# Altium PCB Atmel AVR consumer electronics control board.PcbDoc (part 4 of 4)
Units mm, origin at the board's own origin, x right, y up, seen from the top; angles counter-clockwise.
Board outline 310.13 x 89.13 mm, 2 copper layers (Top Layer, Top, Bottom Layer, Bottom); 455 components, 162 nets, 940 pads, 0 vias.
Unrouted connection lines stored in the file: 21.
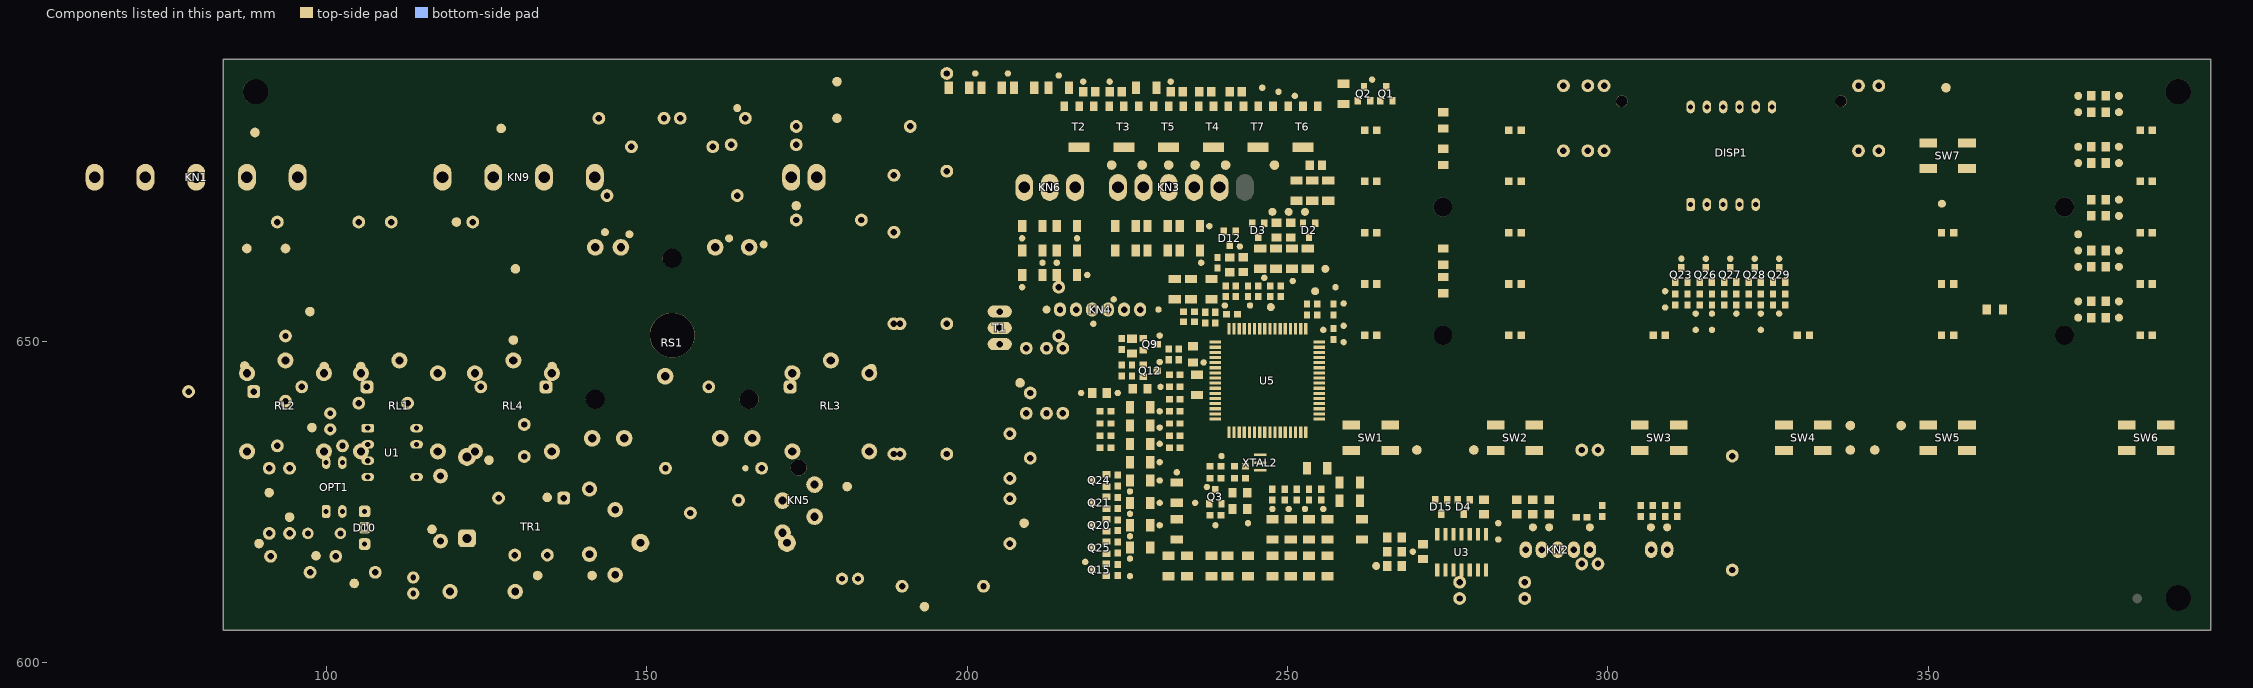
[diagram p4: the components of this part, seen from the top]

## Polygon pours and split planes (outlines as drawn)
JET_POMPASI on Top Layer, Top "Top Layer, Top-JET_POMPASI" (solid, remove dead copper, pour order 290): 244.157,674.053 246.697,676.592 249.237,676.592 252.095,679.45 253.682,679.45 254,679.767 254,681.038 250.825,681.038 248.285,678.497 245.427,678.497 242.252,675.322 242.252,674.053
DOORLOCK on Top Layer, Top "Top Layer, Top-DOORLOCK" (solid, remove dead copper, pour order 288): 224.79,674.053 224.79,676.592 220.345,681.038 215.9,681.038 215.9,679.767 218.757,679.767 222.25,676.275 222.25,674.053
PHASE on Top Layer, Top "Top Layer, Top-PHASE" (solid, remove dead copper, pour order 286): 218.44,675.322 217.487,676.275 214.63,676.275 212.09,678.815 207.327,678.815 207.327,675.322 207.327,672.783 208.28,671.83 212.09,671.83 212.725,671.195 213.042,671.195 213.677,671.83 217.487,671.83 218.44,672.783
-5V on Top Layer, Top "Top Layer, Top--5V" (solid, remove dead copper, pour order 284): 244.792,637.54 245.11,637.857 252.412,637.857 253.047,638.492 253.047,648.335 251.142,650.24 249.936,650.24 249.809,650.367 249.809,652.018 249.492,652.018 249.492,650.367 249.364,650.24 242.252,650.24 243.205,649.288 243.205,641.35 244.475,640.08 244.792,639.762
0V on Top Layer, Top "Top Layer, Top-0V" (solid, remove dead copper, pour order 282): 179.07,677.545 179.07,673.735 180.022,672.783 187.007,672.783 187.007,676.91 184.468,679.45 184.468,681.038 184.15,681.355 182.88,681.355
PHASE on Top Layer, Top "Top Layer, Top-PHASE 1" (solid, remove dead copper, pour order 280): 159.385,677.545 161.607,679.767 161.607,681.038 160.972,681.673 157.162,681.673 156.21,680.72 156.21,674.37 157.162,673.418 158.433,673.418 159.385,674.37
STATOR_COM on Top Layer, Top "Top Layer, Top-STATOR_COM" (solid, remove dead copper, pour order 278): 112.712,678.18 110.49,678.18 109.855,677.545 109.855,657.86 115.887,651.827 126.365,651.827 127.635,650.558 127.635,646.112 128.27,645.477 130.175,645.477 130.81,646.112 130.81,651.192 127.635,654.367 117.157,654.367 113.347,658.178 113.347,677.545
STATOR_LOW_SPEED on Top Layer, Top "Top Layer, Top-STATOR_LOW_SPEED" (solid, remove dead copper, pour order 276): 101.917,675.005 92.392,665.48 92.392,660.4 93.027,659.765 100.647,659.765 101.282,660.4 101.282,669.925 105.093,673.735 105.093,677.545 104.457,678.18 102.552,678.18 101.917,677.545
STATOR_HIGH_SPEED on Top Layer, Top "Top Layer, Top-STATOR_HIGH_SPEED" (solid, remove dead copper, pour order 274): 89.218,666.115 97.472,674.37 97.472,677.545 96.52,678.497 94.932,678.497 86.042,669.607 86.042,660.4 86.677,659.765 88.582,659.765 89.218,660.4
~ROTOR on Top Layer, Top "Top Layer, Top-~ROTOR" (solid, remove dead copper, pour order 272): 120.968,679.132 123.507,681.673 134.938,681.673 134.938,684.847 122.237,684.847 117.792,680.402 117.792,674.053 118.427,673.418 120.332,673.418 120.968,674.053
ROTOR on Top Layer, Top "Top Layer, Top-ROTOR" (solid, remove dead copper, pour order 270): 125.73,674.37 127.953,672.147 127.953,660.082 126.365,658.495 120.65,658.495 119.062,660.082 119.062,662.305 118.427,662.94 116.522,662.94 115.887,662.305 115.887,658.812 118.745,655.955 132.398,655.955 136.843,660.4 136.843,662.305 136.207,662.94 134.302,662.94 130.493,666.75 130.493,675.957 128.27,678.18 126.365,678.18 125.73,677.545
-5V on Top Layer, Top "Top Layer, Top--5V 1" (solid, remove dead copper, pour order 268): 271.145,615.632 272.733,615.632 273.05,615.95 280.416,615.95 280.733,615.632 280.733,614.045 281.241,614.045 281.241,616.649 280.67,617.22 273.368,617.22 272.733,616.585 271.145,616.585
0V on Top Layer, Top "Top Layer, Top-0V 1" (solid, remove dead copper, pour order 266): 254.317,687.07 254.317,685.482 253.682,684.847 248.92,684.847 248.285,685.482 248.285,687.07 247.332,687.07 247.332,685.482 246.697,684.847 241.935,684.847 241.3,685.482 241.3,687.07 240.347,687.07 240.347,685.482 239.712,684.847 234.95,684.847 234.315,685.482 234.315,687.07 233.362,687.07 233.362,685.482 232.727,684.847 227.965,684.847 227.33,685.482 227.33,687.07 226.377,687.07 226.377,685.482 225.742,684.847 220.98,684.847 220.345,685.482 220.345,687.07 219.392,687.07 219.392,685.482 218.757,684.847 215.582,684.847 215.582,682.308 254.317,682.308 255.27,682.308 255.587,681.99 255.587,682.625 255.587,683.577 255.27,683.895 255.27,687.07
AC2 on Top Layer, Top "Top Layer, Top-AC2" (solid, remove dead copper, pour order 264): 194.31,681.038 189.23,681.038 183.832,686.435 177.8,686.435 177.8,683.577 183.197,683.577 188.278,678.497 193.04,678.497 196.215,675.322 197.485,675.322 198.12,675.957 198.12,677.227
PHASE on Top Layer, Top "Top Layer, Top-PHASE 2" (solid, remove dead copper, pour order 262): 159.385,683.26 159.385,687.705 156.845,690.245 152.082,685.482 152.082,684.212 156.21,680.085 156.21,680.72 157.162,681.673 160.972,681.673
0V on Top Layer, Top "Top Layer, Top-0V 2" (solid, remove dead copper, pour order 260): 166.052,651.51 172.085,651.51 173.355,652.78 181.292,652.78 182.562,651.51 189.547,651.51 190.183,652.145 190.183,653.415 188.912,654.685 181.927,654.685 178.118,658.495 178.118,661.035 176.53,662.622 170.498,662.622 168.593,660.717 166.052,660.717
0V on Top Layer, Top "Top Layer, Top-0V 3" (solid, remove dead copper, pour order 258): 153.987,655.32 156.21,655.32 160.02,651.51 167.005,651.51 167.005,660.717 156.528,660.717 153.987,660.717
-5V on Top Layer, Top "Top Layer, Top--5V 2" (solid, remove dead copper, pour order 256): 191.135,631.825 191.135,638.81 186.69,643.255 184.15,643.255 184.15,642.62 188.595,638.175 188.595,631.507 188.912,631.19 190.5,631.19
NET00056 on Top Layer, Top "Top Layer, Top-NET00056" (solid, pour order 254): 92.4,646.2 92.8,645.8 93.6,645.8 94.9,645.8 95.25,646.112 95.25,650.875 97.79,653.415 107.315,653.415 109.855,650.875 109.855,646.112 110.49,645.477 112.395,645.477 113.03,646.112 113.03,651.51 108.267,656.272 95.885,656.272 92.5,652.3 92.5,651.3 92.5,650.3 92.5,649.2 92.5,648.3 92.4,647.3
NET00047 on Top Layer, Top "Top Layer, Top-NET00047" (solid, remove dead copper, pour order 252): 274.637,621.03 275.272,621.665 277.812,621.665 278.447,621.03 279.082,621.665 280.352,621.665 280.988,621.03 281.305,621.347 282.892,621.347 282.892,621.982 274.637,621.982 274.32,622.3 274.32,623.252 273.685,623.252 273.685,622.3 273.685,621.982
NET00055 on Top Layer, Top "Top Layer, Top-NET00055" (solid, remove dead copper, pour order 250): 277.178,618.173 277.495,617.855 281.623,617.855 281.94,618.173 280.035,618.173 279.717,618.49 279.4,618.173 277.495,618.173 277.178,618.49
PHASE on Top Layer, Top "Top Layer, Top-PHASE 3" (solid, remove dead copper, pour order 248): 159.385,687.705 161.29,689.61 191.77,689.61 192.722,688.658 195.262,688.658 195.262,690.245 195.262,692.785 159.385,692.785 156.845,690.245
HEATER_P on Top Layer, Top "Top Layer, Top-HEATER_P" (solid, remove dead copper, pour order 246): 176.657,639 179.705,635.952 179.705,626.872 180.022,626.554 184.15,626.554 185.293,627.697 185.293,636.841 180.848,641.286 180.848,646.875 180.34,647.382 180.34,648.017 179.705,648.652 177.8,648.652 177.165,648.017 177.165,647.319 176.657,646.811
SUTUN_3 on Top Layer, Top "Top Layer, Top-SUTUN_3" (solid, remove dead copper, pour order 244): 319.62,670.3 320.02,669.9 320.02,669.28 320.46,668.84 321.46,668.84 321.02,669.28 321.02,669.9 321.42,670.3 321.42,672.5 321.02,672.9 321.02,673.87 320.02,674.87 320.02,672.9 319.62,672.5
HOT_WATER on Top Layer, Top "Top Layer, Top-HOT_WATER" (solid, remove dead copper, pour order 242): 240.665,674.053 240.665,676.592 243.522,679.45 246.697,679.45 247.015,679.767 247.015,681.038 242.57,681.038 238.125,676.592 238.125,674.053
PREWASH on Top Layer, Top "Top Layer, Top-PREWASH" (solid, remove dead copper, pour order 240): 236.537,674.053 236.537,677.545 238.125,679.132 239.395,679.132 240.03,679.767 240.03,681.038 236.855,681.038 234.315,678.497 234.315,674.053
TAHLIYE_POMPASI on Top Layer, Top "Top Layer, Top-TAHLIYE_POMPASI" (solid, remove dead copper, pour order 238): 228.6,674.053 228.6,678.497 226.06,681.038 222.885,681.038 222.885,679.767 223.52,679.132 224.79,679.132 226.377,677.545 226.377,674.053
0V on Top Layer, Top "Top Layer, Top-0V 4" (solid, remove dead copper, pour order 236): 244.157,639.445 242.57,641.033 242.57,648.97 241.3,650.24 241.3,640.397 244.157,637.54
0V on Top Layer, Top "Top Layer, Top-0V 5" (solid, pour order 234): 187.96,671.83 189.23,671.83 190.183,672.783 193.992,672.783 195.58,671.195 195.58,665.798 198.755,662.622 198.755,666.115 198.12,666.75 198.12,672.147 193.357,676.91 187.007,676.91 187.007,672.783 187.325,672.465
NET00024 on Top Layer, Top "Top Layer, Top-NET00024" (solid, remove dead copper, pour order 232): 203.517,643.572 204.47,642.62 207.645,642.62 208.28,641.985 208.28,641.033 208.28,638.81 210.185,638.81 210.185,640.715 210.82,641.35 210.82,642.62 207.963,645.477 203.835,645.477 203.517,645.16
PHASE on Top Layer, Top "Top Layer, Top-PHASE 4" (solid, pour order 230): 195.262,688.658 192.722,688.658 206.692,674.688 206.692,673.418 207.327,672.783 207.327,678.815 206.692,678.815 197.485,688.022 197.485,691.515 196.215,692.785 195.262,692.785
TACHO_K2 on Top Layer, Top "Top Layer, Top-TACHO_K2" (solid, remove dead copper, pour order 228): 173.355,681.673 172.403,680.72 172.403,669.607 172.403,668.972 174.308,668.972 174.308,669.925 178.118,673.735 178.118,677.545 177.165,678.497 173.99,681.673
AC2 on Top Layer, Top "Top Layer, Top-AC2 1" (solid, remove dead copper, pour order 226): 162.877,672.147 163.512,671.512 165.735,671.512 168.91,674.688 168.91,680.402 172.085,683.577 177.8,683.577 177.8,686.435 171.513,686.435 165.417,680.339 165.417,678.18 164.147,676.91 164.147,674.688 162.877,673.418
NET00096 on Top Layer, Top "Top Layer, Top-NET00096" (solid, remove dead copper, pour order 224): 173.291,642.175 173.291,648.271 173.99,648.97 173.99,649.923 176.213,652.145 174.308,652.145 171.132,648.97 171.132,642.303 171.45,641.985 172.72,641.985
0V on Top Layer, Top "Top Layer, Top-0V 6" (solid, remove dead copper, pour order 222): 139.7,641.921 141.097,643.318 142.939,643.318 144.082,641.921 144.082,641.033 150.495,641.033 150.495,648.017 149.542,648.97 149.542,653.097 151.765,655.32 153.987,655.32 153.987,660.717 151.447,660.717 145.097,660.717 138.748,654.367 138.748,642.303 138.748,641.033 139.7,641.033
~ROTOR on Top Layer, Top "Top Layer, Top-~ROTOR 1" (solid, remove dead copper, pour order 220): 148.273,674.37 149.225,673.418 150.495,673.418 151.447,674.37 151.447,678.815 145.415,684.847 134.938,684.847 134.938,681.673 144.145,681.673 148.273,677.545
P on Top Layer, Top "Top Layer, Top-P" (solid, remove dead copper, pour order 218): 133.985,673.418 133.985,668.02 134.938,667.067 137.16,667.067 141.605,671.512 144.463,671.512 145.097,672.147 145.097,673.418 143.51,675.005 143.51,677.227 142.558,678.18 138.748,678.18
-5V on Top Layer, Top "Top Layer, Top--5V 3" (solid, remove dead copper, pour order 216): 98.425,644.207 97.79,643.572 97.79,641.35 98.425,641.033 99.695,641.033 101.282,641.033 102.235,641.033 102.87,640.397 103.505,640.397 105.093,640.397 106.362,640.397 106.998,640.397 109.22,640.397 111.125,640.397 113,639.5 113.75,640 113.75,640.75 113,641 102.87,641.033 100.965,642.938 100.965,648.97 100.647,649.288 98.742,649.288 98.425,648.97
NET00045 on Top Layer, Top "Top Layer, Top-NET00045" (solid, remove dead copper, pour order 214): 104.14,643.572 105.727,641.985 108.902,641.985 106.68,644.207 106.68,648.97 106.362,649.288 104.457,649.288 104.14,648.97
-5V on Top Layer, Top "Top Layer, Top--5V 4" (solid, remove dead copper, pour order 212): 115.57,642.62 118.745,639.445 121.92,639.445 125.095,642.62 125.095,643.572 124.46,644.207 124.46,648.97 123.19,650.24 117.475,650.24 116.205,648.97 116.205,644.207 115.57,643.572
NET00028 on Top Layer, Top "Top Layer, Top-NET00028" (solid, remove dead copper, pour order 210): 86.2,649.4 86.2,646.1 86.2,642.9 87.7,641.4 89.6,641.4 90.9,641.4 93.3,641.4 92.967,641.765 91.44,641.767 88.5,643.8 88.2,644 88,644.6 88,645.2 88,645.7 88,646.1 88,646.4 88,646.8 88,647.2 88,647.5 88.2,647.7 88.3,648 88.5,648.5 88.8,648.9 88.8,649.4 88.4,650.1 86.9,650.1
SUTUN_3 on Top Layer, Top "Top Layer, Top-SUTUN_3 1" (solid, remove dead copper, pour order 208): 352.107,670.56 353.695,672.147 350.52,672.147
_SATIR_2 on Top Layer, Top "Top Layer, Top-_SATIR_2" (solid, remove dead copper, pour order 206): 319.62,685.54 320.02,685.14 321.02,685.14 321.42,685.54 321.42,687.74 321.02,688.14 320.02,688.14 319.62,687.74
SUTUN_2 on Top Layer, Top "Top Layer, Top-SUTUN_2" (solid, remove dead copper, pour order 204): 327.66,676.91 325.755,678.815 325.438,678.815 323.532,676.91
_SATIR_1 on Top Layer, Top "Top Layer, Top-_SATIR_1" (solid, remove dead copper, pour order 202): 310.9,686.63 312.4,685.13 313.4,685.14 313.8,685.54 313.8,687.74 313.4,688.14 312.41,688.14
SUTUN_5 on Top Layer, Top "Top Layer, Top-SUTUN_5" (solid, remove dead copper, pour order 200): 312,670.3 312.4,669.9 312.4,669.14 313.4,668.14 313.4,669.9 313.8,670.3 313.8,672.5 313.4,672.9 312.4,672.9 312,672.5
0V on Top Layer, Top "Top Layer, Top-0V 7" (solid, remove dead copper, pour order 198): 318.452,631.19 318.452,615.95 320.357,617.855 320.357,631.19 320.675,631.507 320.675,632.777 320.04,633.413 318.77,633.413 318.135,632.777 318.135,631.507
NTC_K1 on Top Layer, Top "Top Layer, Top-NTC_K1" (solid, remove dead copper, pour order 196): 296.227,618.934 296.227,617.347 296.227,615.188 298.132,617.093 298.132,618.934 297.18,619.887
K_SU_SEVIYE_1 on Top Layer, Top "Top Layer, Top-K_SU_SEVIYE_1" (solid, remove dead copper, pour order 194): 290.639,616.458 290.639,618.934 289.814,619.76 289.496,619.76 288.671,618.934 288.671,616.458 289.179,615.95 290.131,615.95
-5V on Top Layer, Top "Top Layer, Top--5V 5" (solid, remove dead copper, pour order 192): 297.18,610.87 295.91,610.87 294.957,611.822 294.957,609.918 295.91,608.965 297.18,608.965
TX on Top Layer, Top "Top Layer, Top-TX" (solid, remove dead copper, pour order 190): 221,653.5 222,652.5 223.5,652.5 223,653 223,656.5 221.4,656.5 221,656.1
SCK on Top Layer, Top "Top Layer, Top-SCK" (solid, remove dead copper, pour order 188): 218.5,653 219.7,651.8 221.2,651.8 220.5,652.5 220.5,656.1 220.1,656.5 218.9,656.5 218.5,656.1
_RESET on Top Layer, Top "Top Layer, Top-_RESET" (solid, remove dead copper, pour order 186): 227,654 229.6,654 228.9,654.7 228.9,655.2 228,656.1 227,656.1
-5V on Top Layer, Top "Top Layer, Top--5V 6" (solid, remove dead copper, pour order 184): 243.205,630.872 243.205,630.237 243.84,630.237 244.157,630.555 244.157,630.872 244.475,631.19 244.157,631.507 244.157,632.777 243.522,632.142 243.522,630.872
0V on Top Layer, Top "Top Layer, Top-0V 8" (solid, remove dead copper, pour order 182): 187.325,684.212 189.23,682.308 191.77,682.308 192.405,682.942 192.405,684.212 190.5,686.117 187.96,686.117 187.325,685.482
0V on Top Layer, Top "Top Layer, Top-0V 9" (solid, remove dead copper, pour order 180): 208.597,651.192 210.185,651.192 210.185,653.097 208.597,653.097 206.058,655.637 206.058,659.447 200.025,665.48 199.39,665.48 198.755,666.115 198.755,662.622 203.517,657.86 203.517,649.288 204.153,648.652 206.058,648.652
AC2 on Top Layer, Top "Top Layer, Top-AC2 2" (solid, remove dead copper, pour order 178): 206.375,648.017 203.2,648.017 202.248,648.97 202.248,657.86 197.485,662.622 196.215,662.622 195.58,661.987 195.58,660.717 199.39,656.908 199.39,648.017 201.295,646.112 206.375,646.112 206.692,646.43 206.692,647.7
-5V on Top Layer, Top "Top Layer, Top--5V 7" (solid, remove dead copper, pour order 176): 213.36,638.81 213.36,639.762 212.407,640.715 211.455,639.762 211.455,638.81
-5V on Top Layer, Top "Top Layer, Top--5V 8" (solid, remove dead copper, pour order 174): 206.68,624.548 211.125,624.548 213.347,626.77 213.347,628.675 211.442,628.675 211.442,627.405 210.49,626.453 206.68,626.453
NTC_K1 on Top Layer, Top "Top Layer, Top-NTC_K1 1" (solid, remove dead copper, pour order 172): 204.153,630.237 203.835,630.555 200.66,630.555 197.485,633.73 196.215,633.73 195.58,633.095 195.58,631.825 197.167,630.237
0V on Top Layer, Top "Top Layer, Top-0V 10" (solid, remove dead copper, pour order 170): 202.565,610.553 207,606 208.3,606 209.75,606 203.835,611.822 203.835,612.457 203.2,613.092 201.93,613.092 201.295,612.457 201.295,611.188 201.93,610.553
220_LINE on Top Layer, Top "Top Layer, Top-220_LINE" (solid, remove dead copper, pour order 168): 177.737,626.682 177.737,634.111 173.165,638.683 161.481,638.683 159.067,636.27 159.067,633.73 163.195,629.602 166.052,629.602 167.005,628.65 167.64,628.65 168.275,628.015 168.275,627.062 169.227,627.062 169.862,626.428 169.862,617.538 170.815,616.585 172.72,616.585 173.672,617.538 173.672,622.617
0V on Top Layer, Top "Top Layer, Top-0V 11" (solid, remove dead copper, pour order 166): 148.907,633.73 148.907,636.27 147.955,637.222 147.955,638.175 150.495,640.715 150.5,641.5 144.082,641.54 144.082,640.207 142.939,638.683 141.097,638.683 139.7,640.08 139.7,641.033 138.748,641.033 138.748,639.127 138.745,638.259 138.745,637.667 138.745,636.943 138.748,636.27 138.748,633.73 140.208,632.711 142.74,632.711 147.764,632.709
P on Top Layer, Top "Top Layer, Top-P 1" (solid, remove dead copper, pour order 164): 117.475,670.242 116.522,669.29 116.522,668.02 117.475,667.067 120.015,667.067 121.602,665.48 121.602,660.717 122.237,660.082 124.142,660.082 124.777,660.717 124.777,669.29 123.825,670.242
P on Top Layer, Top "Top Layer, Top-P 2" (solid, remove dead copper, pour order 162): 104.775,670.242 103.822,669.29 103.822,660.4 104.457,659.765 106.362,659.765 106.998,660.4 106.998,661.987 106.998,669.29 106.045,670.242
SUTUN_1 on Top Layer, Top "Top Layer, Top-SUTUN_1" (solid, remove dead copper, pour order 160): 342.265,678.815 344.805,678.815 344.805,679.45 343.217,681.038 342.265,681.99 341.312,681.038 341.312,679.767
SUTUN_1 on Top Layer, Top "Top Layer, Top-SUTUN_1 1" (solid, remove dead copper, pour order 158): 341.63,670.242 340.678,669.29 340.678,668.02 341.947,668.02 342.9,668.972
_SATIR_2 on Top Layer, Top "Top Layer, Top-_SATIR_2 1" (solid, remove dead copper, pour order 156): 320.01,683.7 321.03,684.72 321.03,685.44 320.01,685.44
0V on Top Layer, Top "Top Layer, Top-0V 12" (solid, remove dead copper, pour order 154): 320.04,648.652 321.31,649.923 320.04,651.192 318.77,651.192 318.135,650.558 318.135,649.288 318.77,648.652
_SATIR_2 on Top Layer, Top "Top Layer, Top-_SATIR_2 2" (solid, remove dead copper, pour order 152): 297.815,679.767 297.815,681.355 298.767,682.308 296.863,682.308 295.91,681.355 295.91,679.767
_SATIR_2 on Top Layer, Top "Top Layer, Top-_SATIR_2 3" (solid, remove dead copper, pour order 150): 295.91,669.607 295.91,668.02 296.863,667.067 297.815,668.02 297.815,669.607
-5V on Top Layer, Top "Top Layer, Top--5V 9" (solid, remove dead copper, pour order 148): 296.863,648.652 297.815,648.652 299.402,650.24 299.402,650.875 297.498,650.875 297.498,649.288
K_FLOWM_2 on Top Layer, Top "Top Layer, Top-K_FLOWM_2" (solid, remove dead copper, pour order 146): 304.8,621.982 306.387,620.395 307.022,620.395 307.34,620.712 307.34,622.935 304.8,622.935
K_FLOWM_1 on Top Layer, Top "Top Layer, Top-K_FLOWM_1" (solid, remove dead copper, pour order 144): 297.18,611.505 298.767,611.505 299.72,612.457 298.767,613.41 297.18,613.41
NET00006 on Top Layer, Top "Top Layer, Top-NET00006" (solid, remove dead copper, pour order 142): 225.806,667.194 228.6,667.194 228.6,668.846 225.806,668.846
NET00016 on Top Layer, Top "Top Layer, Top-NET00016" (solid, remove dead copper, pour order 140): 205.105,688.658 207.645,688.658 207.645,691.515 206.692,692.467 206.058,692.467 205.105,691.515
0V on Top Layer, Top "Top Layer, Top-0V 13" (solid, pour order 138): 207.645,684.212 207.645,682.942 208.28,682.308 215.582,682.308 215.582,683.895 215.582,684.847 213.995,684.847 213.36,684.847 208.28,684.847
NET00077 on Top Layer, Top "Top Layer, Top-NET00077" (solid, remove dead copper, pour order 136): 214.947,651.51 213.995,652.462 212.725,652.462 212.725,651.192 213.677,650.24
NET00077 on Top Layer, Top "Top Layer, Top-NET00077 1" (solid, remove dead copper, pour order 134): 215.265,643.255 215.265,646.112 213.36,644.207 213.36,643.255
NTC on Top Layer, Top "Top Layer, Top-NTC" (solid, remove dead copper, pour order 132): 205.74,638.81 205.74,637.857 206.692,636.905 208.28,636.905 207.645,637.54 207.645,638.81
NTC_K1 on Top Layer, Top "Top Layer, Top-NTC_K1 2" (solid, remove dead copper, pour order 130): 207.327,629.285 206.058,630.555 203.517,630.555 206.058,628.015
NTC_K1 on Top Layer, Top "Top Layer, Top-NTC_K1 3" (solid, remove dead copper, pour order 128): 200.343,613.727 200.025,614.045 199.072,614.045 196.85,614.045 196.532,613.727 196.215,613.41 195.58,612.775 195.58,611.505 196.215,610.87 197.485,610.87 198.12,611.505
_ROTARY_4 on Top Layer, Top "Top Layer, Top-_ROTARY_4" (solid, remove dead copper, pour order 126): 165.1,663.257 167.322,663.257 169.227,665.163 168.275,666.115 165.1,666.115 164.465,665.48 164.465,663.892
_ROTARY_3 on Top Layer, Top "Top Layer, Top-_ROTARY_3" (solid, remove dead copper, pour order 124): 159.702,663.257 161.607,663.257 163.512,665.163 163.512,666.75 160.338,666.75 159.067,665.48 159.067,663.892
_ROTARY_2 on Top Layer, Top "Top Layer, Top-_ROTARY_2" (solid, remove dead copper, pour order 122): 145.097,663.257 147.002,663.257 147.637,663.892 147.637,665.48 150.177,668.02 149.86,668.02 149.225,667.385 146.368,667.385 144.463,665.48 144.463,663.892
_ROTARY_1 on Top Layer, Top "Top Layer, Top-_ROTARY_1" (solid, remove dead copper, pour order 120): 142.875,663.257 143.51,663.892 143.51,665.48 146.05,668.02 142.875,668.02 140.335,665.48 140.335,663.892 140.97,663.257
0V on Top Layer, Top "Top Layer, Top-0V 14" (solid, remove dead copper, pour order 118): 151.13,643.572 152.718,641.985 153.035,641.985 154.623,643.572 154.623,645.477 153.67,646.43 152.082,646.43 151.13,645.477
0V on Top Layer, Top "Top Layer, Top-0V 15" (solid, remove dead copper, pour order 116): 151.447,629.285 152.082,628.65 153.67,628.65 154.305,629.285 154.305,631.19 153.67,631.825 152.082,631.825 151.447,631.19
0V on Top Layer, Top "Top Layer, Top-0V 16" (solid, pour order 114): 103.188,639.127 103.188,637.222 103.188,635.952 106.045,633.095 115.57,633.095 118.9,638.2 118.9,639 109.75,639
MAINWASH on Top Layer, Top "Top Layer, Top-MAINWASH" (solid, remove dead copper, pour order 112): 232.727,674.053 232.727,681.038 230.188,681.038 230.188,674.053
-5V on Top Layer, Top "Top Layer, Top--5V 10" (solid, remove dead copper, pour order 110): 186.69,643.255 186.69,648.652 185.42,649.923 184.468,649.923 183.832,649.288 183.832,648.335 184.15,648.017 184.15,643.255
NET00066 on Top Layer, Top "Top Layer, Top-NET00066" (solid, remove dead copper, pour order 108): 133.985,644.207 133.35,643.572 133.35,642.938 134.302,641.985 134.938,641.985 136.525,643.572 136.525,649.605 135.255,650.875 133.985,649.605
SUTUN_4 on Top Layer, Top "Top Layer, Top-SUTUN_4" (solid, remove dead copper, pour order 106): 352.107,662.622 353.695,664.21 350.837,664.21 350.837,663.892
SUTUN_2 on Top Layer, Top "Top Layer, Top-SUTUN_2 1" (solid, remove dead copper, pour order 104): 338.137,677.862 337.185,676.91 340.995,676.91 340.042,677.862 340.042,679.767 338.137,679.767
_SATIR_4 on Top Layer, Top "Top Layer, Top-_SATIR_4" (solid, remove dead copper, pour order 102): 331.47,660.717 331.47,665.163 329.248,662.94
SUTUN_2 on Top Layer, Top "Top Layer, Top-SUTUN_2 2" (solid, remove dead copper, pour order 100): 324.7,685.54 325.1,685.14 325.1,684.08 325.6,683.58 326.1,684.08 326.1,685.14 326.5,685.54 326.5,687.74 326.1,688.14 325.1,688.14 324.7,687.74
_SATIR_3 on Top Layer, Top "Top Layer, Top-_SATIR_3" (solid, remove dead copper, pour order 98): 322.16,685.54 322.56,685.14 323.56,685.14 323.96,685.54 323.96,687.74 323.56,688.14 322.56,688.14 322.16,687.74
SUTUN_7 on Top Layer, Top "Top Layer, Top-SUTUN_7" (solid, remove dead copper, pour order 96): 322.16,670.3 322.56,669.9 323.56,669.9 323.96,670.3 323.96,672.5 323.06,673.4 322.16,672.5
SUTUN_6 on Top Layer, Top "Top Layer, Top-SUTUN_6" (solid, remove dead copper, pour order 94): 317.08,685.54 317.48,685.14 318.48,685.14 318.88,685.54 318.88,687.74 318.48,688.14 317.48,688.14 317.08,687.74
SUTUN_1 on Top Layer, Top "Top Layer, Top-SUTUN_1 2" (solid, remove dead copper, pour order 92): 314.54,685.54 314.94,685.14 315.94,685.14 316.34,685.54 316.34,687.74 315.94,688.14 314.94,688.14 314.54,687.74
SUTUN_8 on Top Layer, Top "Top Layer, Top-SUTUN_8" (solid, remove dead copper, pour order 90): 317.08,670.3 317.48,669.9 317.48,669.45 318.48,668.46 318.48,669.9 318.88,670.3 318.88,672.5 318.48,672.9 317.48,672.9 317.08,672.5
SUTUN_4 on Top Layer, Top "Top Layer, Top-SUTUN_4 1" (solid, remove dead copper, pour order 88): 314.54,670.3 314.94,669.9 314.94,669.15 315.94,668.15 315.94,669.9 316.34,670.3 316.34,672.5 315.94,672.9 314.94,672.9 314.54,672.5
K_FLOWM_1 on Top Layer, Top "Top Layer, Top-K_FLOWM_1 1" (solid, remove dead copper, pour order 86): 310.261,616.458 310.261,618.934 309.435,619.76 309.118,619.76 308.292,618.934 308.292,616.458 308.8,615.95 309.753,615.95
K_FLOWM_2 on Top Layer, Top "Top Layer, Top-K_FLOWM_2 1" (solid, remove dead copper, pour order 84): 307.721,616.458 307.721,618.934 306.895,619.76 306.578,619.76 305.752,618.934 305.752,616.458 306.26,615.95 307.213,615.95
-5V on Top Layer, Top "Top Layer, Top--5V 11" (solid, remove dead copper, pour order 82): 297.815,632.46 300.355,629.92 302.895,629.92 299.085,633.73
0V on Top Layer, Top "Top Layer, Top-0V 17" (solid, remove dead copper, pour order 80): 295.656,616.458 295.656,618.934 294.83,619.76 294.513,619.76 293.688,618.934 293.688,616.458 294.195,615.95 295.148,615.95
-5V on Top Layer, Top "Top Layer, Top--5V 12" (solid, remove dead copper, pour order 78): 293.179,616.458 293.179,618.934 292.354,619.76 292.036,619.76 291.211,618.934 291.211,616.458 291.719,615.95 292.671,615.95
0V on Top Layer, Top "Top Layer, Top-0V 18" (solid, remove dead copper, pour order 76): 294.64,632.46 295.91,631.19 296.863,632.142 296.863,634.048 296.545,634.365 295.275,634.365 294.64,633.73
K_SU_SEVIYE_2 on Top Layer, Top "Top Layer, Top-K_SU_SEVIYE_2" (solid, remove dead copper, pour order 74): 288.163,616.458 288.163,618.934 287.337,619.76 287.02,619.76 286.195,618.934 286.195,616.458 286.702,615.95 287.655,615.95
-5V on Top Layer, Top "Top Layer, Top--5V 13" (solid, remove dead copper, pour order 72): 285.433,610.87 283.527,608.965 287.02,608.965 287.02,610.87
RX on Top Layer, Top "Top Layer, Top-RX" (solid, remove dead copper, pour order 70): 225.4,655.8 226.3,656.7 224.6,656.7 223.6,655.7 223.6,653.6 224.1,653.1 226,653.1 225.4,653.7
-5V on Top Layer, Top "Top Layer, Top--5V 14" (solid, remove dead copper, pour order 68): 215.4,653.2 215.4,656.2 213.9,656.2 213.6,655.9 213.6,654 213.9,653.7 214.9,653.7
0V on Top Layer, Top "Top Layer, Top-0V 19" (solid, remove dead copper, pour order 66): 217.9,653.2 217.9,656.5 218.7,657.3 217.6,657.3 216.1,655.8 216.1,653.6 217.2,652.5
0V on Top Layer, Top "Top Layer, Top-0V 20" (solid, remove dead copper, pour order 64): 215.9,639.762 214.947,640.715 213.995,640.715 213.995,638.81 215.9,638.81
0V on Top Layer, Top "Top Layer, Top-0V 21" (solid, remove dead copper, pour order 62): 212.725,684.847 211.455,686.117 211.455,690.245 211.137,690.562 210.185,690.562 210.185,686.117 208.915,684.847
NET00004 on Top Layer, Top "Top Layer, Top-NET00004" (solid, remove dead copper, pour order 60): 161.925,684.212 162.56,683.577 165.417,683.577 166.37,684.53 166.37,686.117 165.417,687.07 162.877,687.07 161.925,686.117
220_LINE on Top Layer, Top "Top Layer, Top-220_LINE 1" (solid, remove dead copper, pour order 58): 166.243,625.793 164.973,627.062 163.703,627.062 163.068,626.428 163.068,625.158 163.703,624.522 164.973,624.522
0V on Top Layer, Top "Top Layer, Top-0V 22" (solid, pour order 56): 159.385,608.33 156.845,610.87 154.305,608.33
SUTUN_6 on Top Layer, Top "Top Layer, Top-SUTUN_6 1" (solid, remove dead copper, pour order 54): 376.618,683.006 375.412,684.212 374.205,683.006
SUTUN_7 on Top Layer, Top "Top Layer, Top-SUTUN_7 1" (solid, remove dead copper, pour order 52): 376.618,675.005 375.412,676.212 374.205,675.005
SUTUN_8 on Top Layer, Top "Top Layer, Top-SUTUN_8 1" (solid, remove dead copper, pour order 50): 376.682,666.94 375.412,668.211 374.142,666.94
SUTUN_9 on Top Layer, Top "Top Layer, Top-SUTUN_9" (solid, remove dead copper, pour order 48): 376.618,659.003 375.412,660.209 374.205,659.003
SUTUN_10 on Top Layer, Top "Top Layer, Top-SUTUN_10" (solid, remove dead copper, pour order 46): 375.412,649.795 376.618,651.002 375.412,652.208
SUTUN_2 on Top Layer, Top "Top Layer, Top-SUTUN_2 3" (solid, remove dead copper, pour order 44): 338.455,670.242 337.502,669.29 337.502,668.02 338.772,668.02 339.725,668.972
_SATIR_3 on Top Layer, Top "Top Layer, Top-_SATIR_3 1" (solid, remove dead copper, pour order 42): 322.55,683.07 323.57,684.09 323.57,685.37 322.55,685.37
SUTUN_7 on Top Layer, Top "Top Layer, Top-SUTUN_7 2" (solid, remove dead copper, pour order 40): 320.993,676.275 322.897,674.37 323.215,674.37 325.12,676.275
SUTUN_6 on Top Layer, Top "Top Layer, Top-SUTUN_6 2" (solid, remove dead copper, pour order 38): 318.49,689.5 317.47,688.48 317.47,687.76 318.49,687.76
SUTUN_1 on Top Layer, Top "Top Layer, Top-SUTUN_1 3" (solid, remove dead copper, pour order 36): 313.373,690.562 314.642,689.293 314.642,687.387 316.23,687.387 316.23,689.293 317.5,690.562
SUTUN_6 on Top Layer, Top "Top Layer, Top-SUTUN_6 3" (solid, remove dead copper, pour order 34): 317.47,683.38 318.49,684.4 318.49,685.12 317.47,685.12
SUTUN_4 on Top Layer, Top "Top Layer, Top-SUTUN_4 2" (solid, remove dead copper, pour order 32): 314.93,672.34 315.95,672.34 315.95,673.06 314.93,674.08
SUTUN_8 on Top Layer, Top "Top Layer, Top-SUTUN_8 2" (solid, remove dead copper, pour order 30): 317.47,672.67 318.49,672.67 318.49,673.39 317.47,674.41
K_FLOWM_1 on Top Layer, Top "Top Layer, Top-K_FLOWM_1 2" (solid, remove dead copper, pour order 28): 311.15,622.935 308.61,622.935 308.61,620.712 308.928,620.395 309.562,620.395 311.15,621.982
_SATIR_3 on Top Layer, Top "Top Layer, Top-_SATIR_3 2" (solid, remove dead copper, pour order 26): 299.402,678.815 300.99,678.815 301.942,679.767 300.99,680.72 299.402,680.72
_SATIR_3 on Top Layer, Top "Top Layer, Top-_SATIR_3 3" (solid, remove dead copper, pour order 24): 298.45,669.607 298.45,668.02 299.402,667.067 300.355,668.02 300.355,669.607
-5V on Top Layer, Top "Top Layer, Top--5V 15" (solid, remove dead copper, pour order 22): 301.625,623.252 302.895,624.522 299.085,624.522 299.085,624.205 300.673,624.205
_SATIR_1 on Top Layer, Top "Top Layer, Top-_SATIR_1 1" (solid, remove dead copper, pour order 20): 294.005,679.767 294.005,681.99 296.227,684.212 294.322,684.212 292.1,681.99 292.1,679.767
_SATIR_1 on Top Layer, Top "Top Layer, Top-_SATIR_1 2" (solid, remove dead copper, pour order 18): 292.1,669.607 292.1,668.02 293.053,667.067 294.005,668.02 294.005,669.607
0V on Top Layer, Top "Top Layer, Top-0V 23" (solid, remove dead copper, pour order 16): 295.275,652.145 294.005,650.875 295.275,649.605 296.545,649.605 296.863,649.923 296.863,651.827 296.545,652.145
K_FLOWM_1 on Top Layer, Top "Top Layer, Top-K_FLOWM_1 3" (solid, remove dead copper, pour order 14): 287.02,613.41 285.115,613.41 283.21,611.505 287.02,611.505
NET00000 on Top Layer, Top "Top Layer, Top-NET00000" (solid, remove dead copper, pour order 12): 230.822,667.194 233.68,667.194 233.68,668.846 230.822,668.846
0V on Top Layer, Top "Top Layer, Top-0V 24" (solid, remove dead copper, pour order 10): 213.995,627.38 214.947,626.428 215.9,627.38 215.9,628.65 213.995,628.65
0V on Top Layer, Top "Top Layer, Top-0V 25" (solid, remove dead copper, pour order 8): 216.535,612.457 215.265,613.727 213.995,612.457 213.995,611.188 214.63,610.553 215.9,610.553 216.535,611.188
NET00035 on Top Layer, Top "Top Layer, Top-NET00035" (solid, remove dead copper, pour order 6): 210.185,628.65 210.185,629.92 210.82,630.555 209.232,630.555 208.28,629.602 208.28,628.65
NET00017 on Top Layer, Top "Top Layer, Top-NET00017" (solid, remove dead copper, pour order 4): 200.025,688.658 202.565,688.658 202.565,691.197 201.612,692.15 200.977,692.15 200.025,691.197
NET00074 on Top Layer, Top "Top Layer, Top-NET00074" (solid, remove dead copper, pour order 2): 183.197,668.337 183.515,668.02 186.69,668.02 185.102,669.607 183.197,669.607
0V on Top Layer, Top "Top Layer, Top-0V 26" (solid, remove dead copper, pour order 0): 155.575,622.617 156.21,621.982 157.48,621.982 158.115,622.617 158.115,623.887 157.48,624.522 156.21,624.522 155.575,623.887

## Keep-outs
Keep-Out Layer, Board:
  lines w0.127: 84,605 394,605 ; 84,605 394,605 ; 84,605 84,694 ; 84,605 84,694 ; 84,694 394,694 ; 84,694 394,694 ; 394,605 394,694 ; 394,605 394,694
  lines w0.254: 338.75,648 344.75,648 344.75,654 338.75,654 338.75,648
  lines w1.5: 90.8,647.8 90.8,650.6 ; 120.206,634.492 123.888,634.492 ; 128.173,634.256 131.636,634.238 ; 170.498,680.72 172.403,682.625 175.577,682.625 ; 174.902,638.81 178.712,635 178.712,625.048

## Other copper
Top Layer, Top:
  text "B7S_G11" at 368.8,622.1 h1.59

## Silkscreen, mask and mechanical layers (free items; w line width, h text height)
Top Overlay, Top Silk:
  drawing of 56 lines, arcs and shapes, not listed
Bottom Overlay, Bot Silk:
  lines w0.508: 314.173,669.9 314.173,672.9 ; 314.173,685.14 314.173,688.14 ; 316.713,669.9 316.713,672.9 ; 316.713,685.14 316.713,688.14 ; 319.253,669.9 319.253,672.9 ; 319.253,685.14 319.253,688.14 ; 321.793,669.9 321.793,672.9 ; 321.793,685.14 321.793,688.14 ; 324.333,685.14 324.333,688.14
  text "AC2" at 164.02,686.983 h1.59 r270
  text "TACH" at 174.815,685.951 h1.59 r270
  text "0V" at 178.943,685.911 h1.59 r270
  text "PHASE" at 156.083,685.356 h1.59 r270
  text "P" at 140.208,684.363 h1.59 r270
  text "~ROTOR" at 147.669,684.324 h1.59 r270
  text "PUMP" at 225.615,679.482 h1.59 r270
  text "JET PUMP" at 241.49,679.482 h1.59 r270
  text "MAINWASH" at 229.743,679.323 h1.59 r270
  text "DOORLOCK" at 221.805,679.204 h1.59 r270
  text "ST LOW" at 101.79,679.164 h1.59 r270
  text "PREWASH" at 233.87,679.125 h1.59 r270
  text "ST HIGH" at 93.853,679.085 h1.59 r270
  text "HOT WATER" at 237.68,679.045 h1.59 r270
  text "ST COM" at 109.728,679.005 h1.59 r270
  text "PHASE" at 209.423,679.005 h1.59 r270
  text "PHASE" at 212.28,679.005 h1.59 r270
  text "PHASE" at 215.138,679.005 h1.59 r270
  text "~ROTOR" at 117.507,678.926 h1.59 r270
  text "ROTOR" at 125.603,678.926 h1.59 r270
  text "PIN 1" at 128.778,671.068 h1.59 r270
  text "PIN 1" at 167.513,671.068 h1.59 r270
  text "PIN 1" at 182.118,671.068 h1.59 r270
  text "PIN 1" at 215.138,664.083 h1.59 r270
  text "PIN 1" at 237.363,664.083 h1.59 r270
  text "SCK" at 218.364,659.387 h1.11 r270
  text "TX" at 220.904,659.371 h1.11 r270
  text "-5V" at 213.601,659.34 h1.11 r270
  text "0V" at 215.824,659.324 h1.11 r270
  text "RX" at 223.444,659.252 h1.11 r270
  text "_RESET" at 225.984,659.157 h1.11 r270
  text "PIN 1" at 229.794,653.783 h1.11 r270
  text "WATER_LVL_2" at 285.991,622.049 h1.11 r270
  text "WATER_LVL_1" at 288.531,622.049 h1.11 r270
  text "NTC_K1" at 296.151,621.89 h1.11 r270
  text "-5V" at 291.071,621.875 h1.11 r270
  text "0V" at 293.294,621.859 h1.11 r270
  text "FLOW_2" at 305.676,621.867 h1.11 r270
  text "FLOW_1" at 308.216,621.867 h1.11 r270
  text "PIN 1" at 299.644,616.318 h1.11 r270
  text "PIN 1" at 311.709,616.318 h1.11 r270
Top Solder, Top Mask:
  drawing of 91 lines, arcs and shapes, not listed
Mechanical 1, Top Assy:
  circle w0.127: c154,651 r24
  circle w0.127: c154,651 r24
  circle w0.127: c308,635 r8
  circle w0.127: c285.5,635 r8
  circle w0.127: c384,635 r11
  circle w0.127: c384,675 r4
  circle w0.127: c353,679 r7
  circle w0.127: c285.5,675 r4
  circle w0.127: c263,675 r4
  circle w0.127: c384,683 r4
  circle w0.127: c384,651 r4
  circle w0.127: c384,659 r4
  circle w0.127: c384,667 r4
  circle w0.127: c353,651 r4
  circle w0.127: c353,659 r4
  circle w0.127: c353,667 r4
  circle w0.127: c353,635 r8
  circle w0.127: c330.5,635 r8
  circle w0.127: c285.5,683 r4
  circle w0.127: c285.5,651 r4
  circle w0.127: c285.5,659 r4
  circle w0.127: c285.5,667 r4
  circle w0.127: c263,683 r4
  circle w0.127: c263,667 r4
  circle w0.127: c263,651 r4
  circle w0.127: c263,659 r4
  circle w0.127: c263,635 r8
  lines w0.127: 84,613 394,613 ; 84,615 394,615 ; 84,617 394,617 ; 84,679 395,679 ; 84,681 395,681 ; 189.865,622.617 190.817,621.665 194.945,621.665 195.897,622.617 195.897,628.015 194.945,628.967 190.817,628.967 189.865,628.015 189.865,622.617 ; 189.865,666.115 190.817,665.163 194.945,665.163 195.897,666.115 195.897,671.512 194.945,672.465 190.817,672.465 189.865,671.512 189.865,666.115 ; 197.802,622.617 198.755,621.665 202.882,621.665 203.835,622.617 203.835,628.015 202.882,628.967 198.755,628.967 197.802,628.015 197.802,622.617 ; 197.802,666.115 198.755,665.163 202.882,665.163 203.835,666.115 203.835,671.512 202.882,672.465 198.755,672.465 197.802,671.512 197.802,666.115
  lines w0.254: 151.5,651 156.5,651 ; 154,649 154,653.5 ; 260.5,651 265.5,651 ; 260.5,659 265.5,659 ; 260.5,667 265.5,667 ; 260.5,675 265.5,675 ; 260.5,683 265.5,683 ; 261,635 265,635 ; 263,633 263,637 ; 263,648.5 263,653.5 ; 263,656.5 263,661.5 ; 263,664.5 263,669.5 ; 263,672.5 263,677.5 ; 263,680.5 263,685.5 ; 283,635 288,635 ; 283,651 288,651 ; 283,659 288,659 ; 283,667 288,667 ; 283,675 288,675 ; 283,683 288,683 ; 283.5,635 287.5,635 ; 285.5,632.5 285.5,637.5 ; 285.5,633 285.5,637 ; 285.5,648.5 285.5,653.5 ; 285.5,656.5 285.5,661.5 ; 285.5,664.5 285.5,669.5 ; 285.5,672.5 285.5,677.5 ; 285.5,680.5 285.5,685.5 ; 305.5,635 310.5,635 ; 305.5,651 310.5,651 ; 306,635 310,635 ; 308,632.5 308,637.5 ; 308,633 308,637 ; 308,648.5 308,653.5 ; 316.75,679 321.75,679 ; 319.25,676.5 319.25,681.5 ; 328,635 333,635 ; 328,651 333,651 ; 328.5,635 332.5,635 ; 330.5,632.5 330.5,637.5 ; 330.5,633 330.5,637 ; 330.5,648.5 330.5,653.5 ; 350,659 356,659 ; 350,667 356,667 ; 350,679 356,679 ; 350.5,651 355.5,651 ; 350.5,659 355.5,659 ; 350.5,667 355.5,667 ; 350.5,679 355.5,679 ; 351,635 355,635 ; 353,633 353,637 ; 353,648.5 353,653.5 ; 353,656.5 353,661.5 ; 353,664.5 353,669.5 ; 353,676.5 353,681.5 ; 381,659 387,659 ; 381,667 387,667 ; 381,675 387,675 ; 381,683 387,683 ; 381.5,635 386.5,635 ; 381.5,651 386.5,651 ; 381.5,659 386.5,659 ; 381.5,667 386.5,667 ; 381.5,675 386.5,675 ; 381.5,683 386.5,683 ; 384,632.5 384,637.5 ; 384,648.5 384,653.5 ; 384,656.5 384,661.5 ; 384,664.5 384,669.5 ; 384,672.5 384,677.5 ; 384,680.5 384,685.5 ; 301.15,669.5 337.35,669.5 337.35,688.5 301.15,688.5 301.15,669.5 ; 350.5,635 355.5,635 350.5,635 ; 353,632.5 353,637.5 353,632.5

## Dimensions
263,685.5 to 285.5,685.5 on Mechanical 1, Top Assy
394,694 to 384,685.5 on Mechanical 1, Top Assy
386.5,635 to 381.5,651 on Mechanical 1, Top Assy
381.5,683 to 387,675 on Mechanical 1, Top Assy
316.75,679 to 283,683 on Mechanical 1, Top Assy
285.5,685.5 to 319.25,681.5 on Mechanical 1, Top Assy
353,676.5 to 384,685.5 on Mechanical 1, Top Assy
319.25,681.5 to 353,676.5 on Mechanical 1, Top Assy
330.5,653.5 to 308,648.5 on Mechanical 1, Top Assy
330.5,653.5 to 353,648.5 on Mechanical 1, Top Assy
285.5,648.5 to 308,648.5 on Mechanical 1, Top Assy
381.5,683 to 84,694 on Mechanical 1, Top Assy
356,679 to 356,667 on Mechanical 1, Top Assy

## Text inside footprints (layer, text, board x,y; h text height)
D10: Top Overlay, Top Silk "A" at 106.952,621.46 h0.95 r270; Top Overlay, Top Silk "C" at 106.952,618.662 h0.95 r270; Top Overlay, Top Silk "R" at 106.952,624.619 h0.95 r270
T1: Bottom Overlay, Bot Silk "A2" at 208.28,651.069 h1.11 r270; Bottom Overlay, Bot Silk "G" at 208.28,654.013 h1.11 r270; Bottom Overlay, Bot Silk "A1" at 208.28,648.529 h1.11 r270